# Altium PCB SB13ECU_EVL_V01_14031129.PcbDoc (part 2 of 2)
Units mil, origin at the board's own origin, x right, y up, seen from the top; angles counter-clockwise.
Board outline 4750 x 3350 mil, 2 copper layers (Top Layer, Bottom Layer); 220 components, 147 nets, 766 pads, 407 vias.
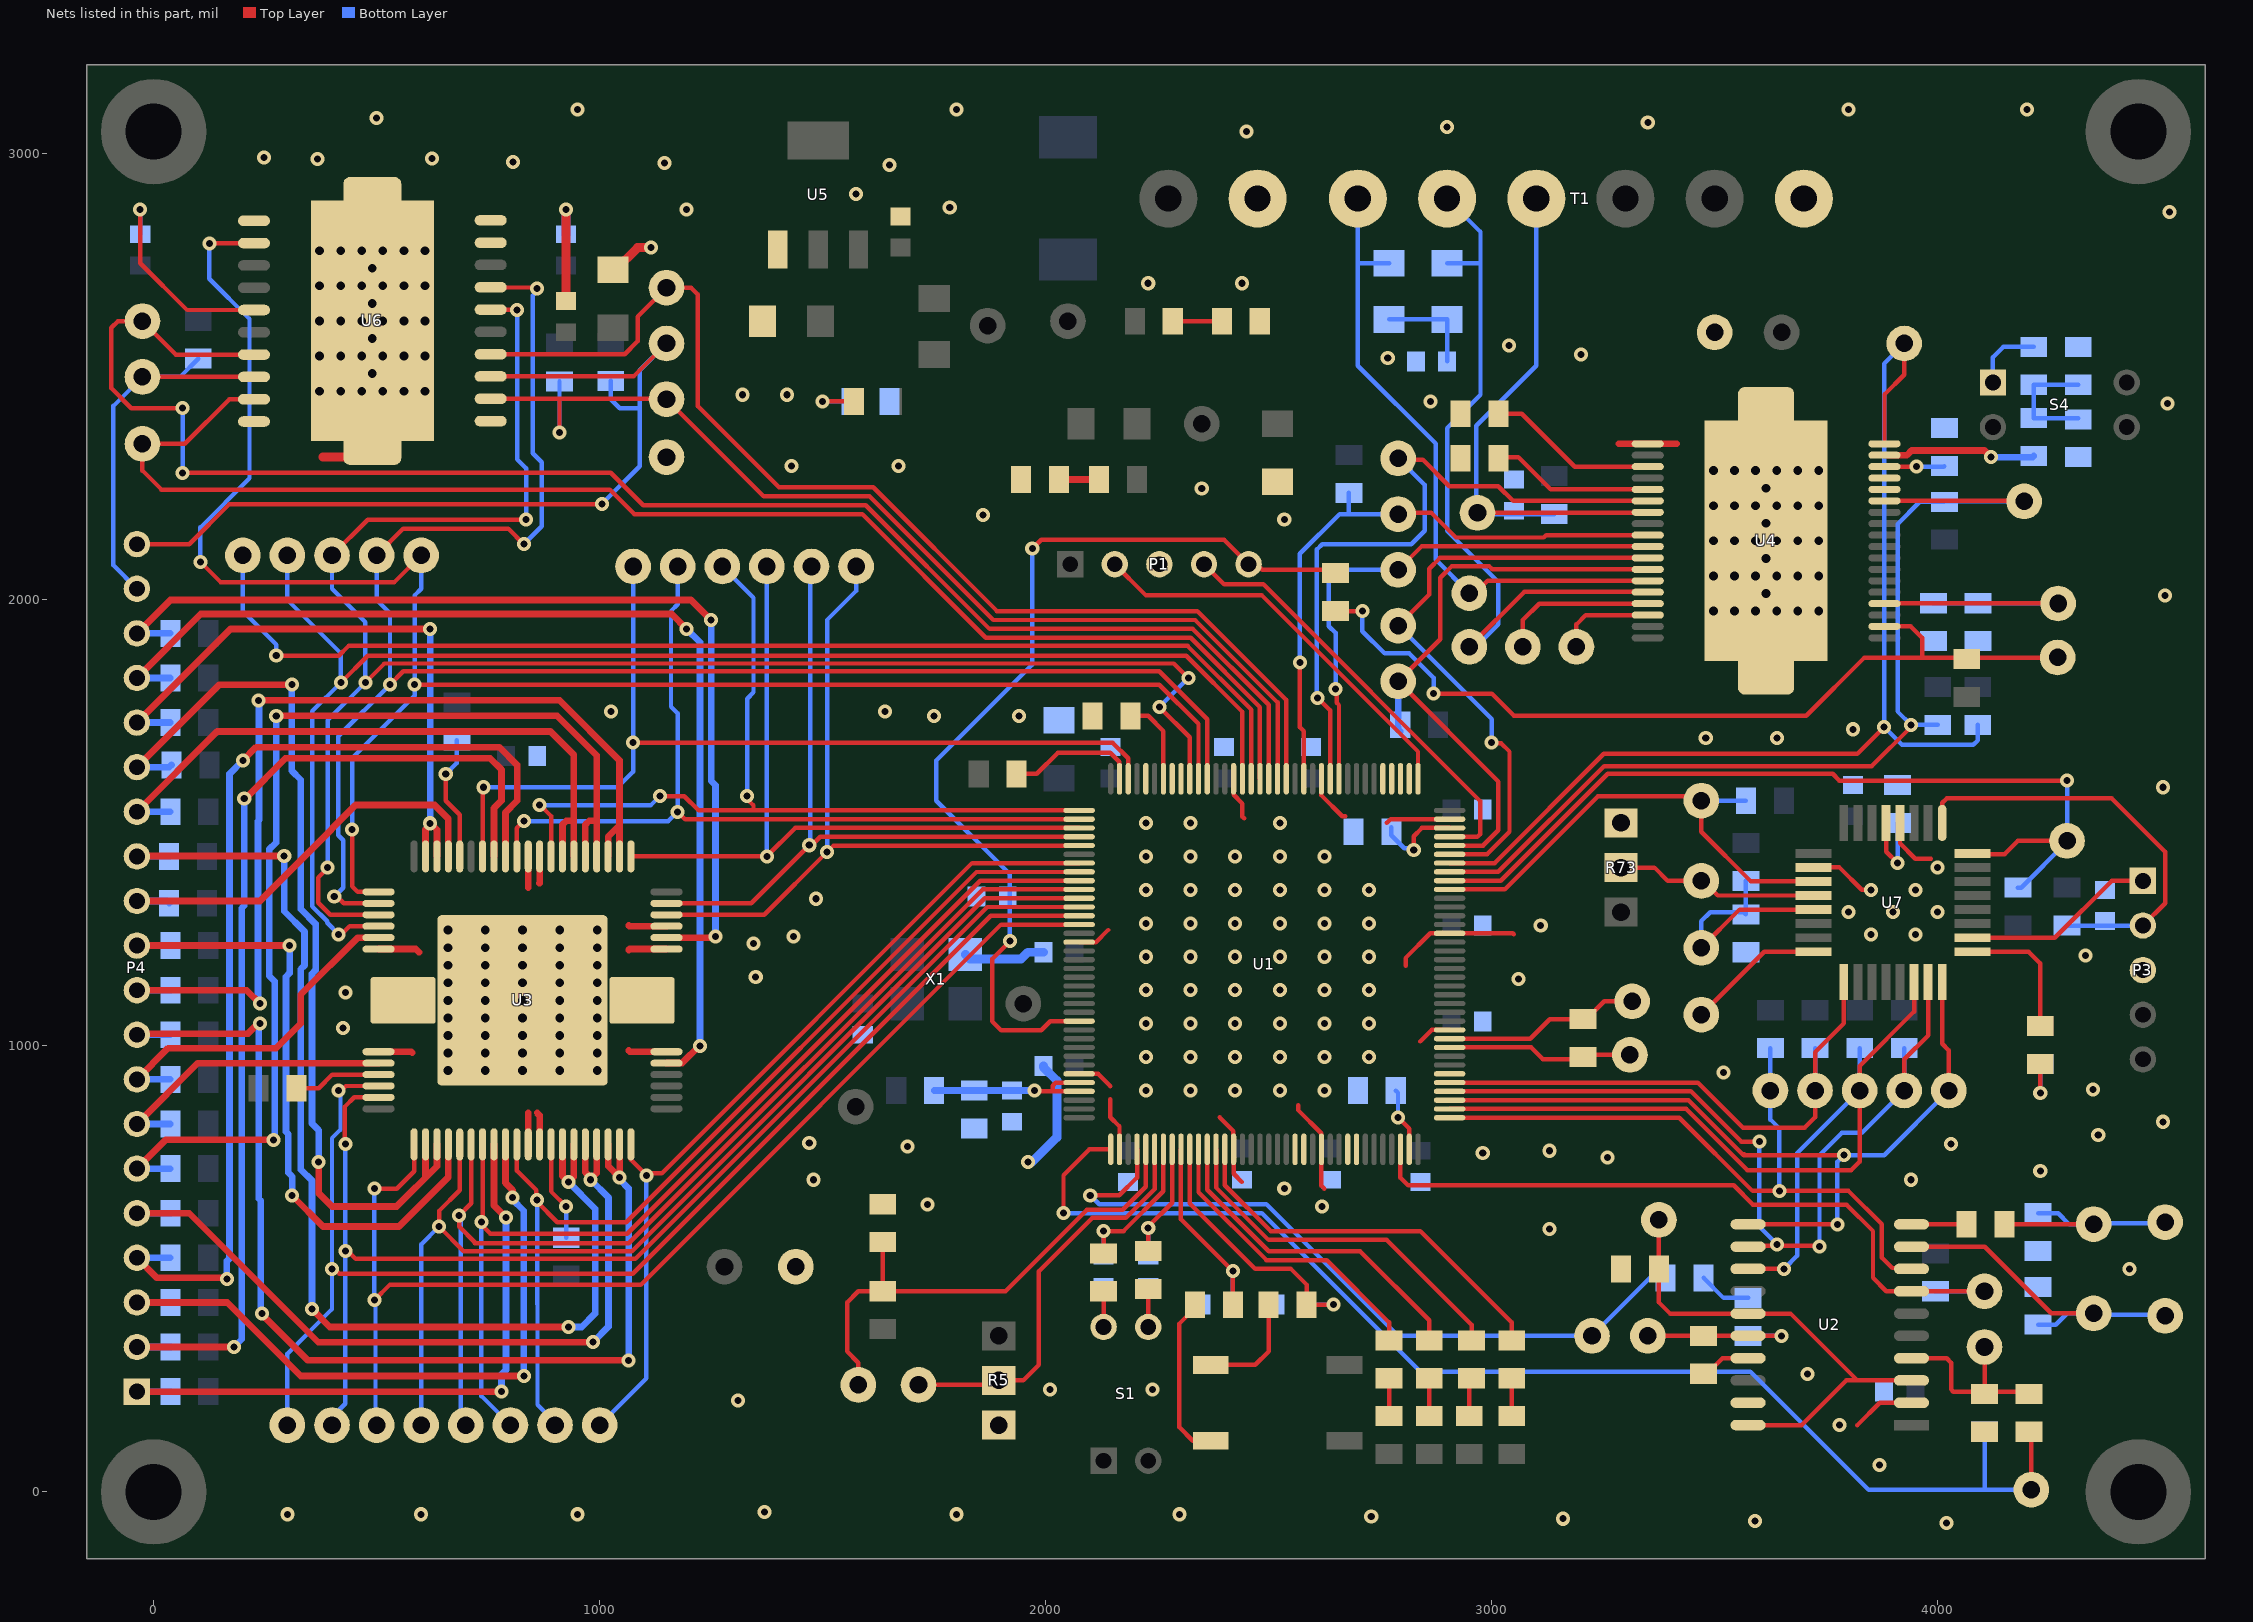
[diagram p2: the nets of this part, all layers, seen from the top]

## Via types
v1: diameter 31.5, hole 15.75, Top Layer to Bottom Layer, 294 vias
v2: diameter 25.59, hole 19.68, Top Layer to Bottom Layer, tented both sides, 113 vias

## Nets (pads, with @x,y where several pads share a name; then routed paths per layer and width w, separated by ;. In a path a pad name is that pad's centre, name@x,y a point inside that pad or via, vN(x,y) a via of type N, cw(c..) or ccw(c..) an arc to the next point about the centre after c; other vN are vias at no path point) (continued)
DGND: C1.2 C2.2 C3.2 C4.2 C5.2 C6.2 C7.1 C8.1 C9.1 C10.1 C11.1 C12.2 C13.2 C14.2 C15.2 C16.2 C17.2 C18.2 C19.2 C20.2 C21.2 C22.2 C23.2 C24.2 C26.1 C27.1 C28.2 C29.2 C30.2 C31.1 C32.2 C33.2 C34.2 C35.1 C36.1 C37.2 C39.1 C40.2 C41.2 C42.2 C43.2 C44.2 P1.3 P3.3 R1.1 R5.1 R8.1 R18.1 R52.2 R53.1 R54.2 R59.2 R61.1 R63.1 R65.1 R72.1 R73.3 R77.1 T1.1 T2.2 TP67.1 TP69.1 TP70.1 U1.16 U1.31 U1.38 U1.51 U1.61 U1.83 U1.94 U1.107 U1.120 U1.130 U2.2 U2.19 U3.11 U3.12 U3.26 U3.27 U3.29 U3.41 U3.42 U3.58 U3.59 U3.65 U4.1 U4.37 U5.1 U6.1 U6.10 U6.11 U6.19 U6.20 U6.21 U7.4 U7.10 X1.2 | length 3559.1
  Top Layer w10: U1.16@2075,1232.8 2112.8,1232.8 2140,1260 ; U1.31@2075.35,937.17 2117.83,937.17 2145,910 ; 2145,880 2145,840 2165.55,819.45 U1.38@2165.55,768.23 ; 2390,840 2421.11,808.89 U1.51@2421.11,768.57 ; U1.51@2421.46,768.23 2421.46,713.54 2440,695 ; U1.130@2421.46,1598.94 2421.46,1562.97 2441.14,1543.28 2441.14,1513.86 2445,1510 ; 2566,867 2566,856.41 2617.96,804.45 ; 2618.31,804.45 U1.61@2618.31,768.23 2618.31,686.69 2625,680 ; U1.120@2618.31,1598.94 2618.31,1561.69 2665,1515 2672,1515 ; 2765,1500 2773.39,1508.39 U1.107@2905.71,1508.39 ; 2807,1180 2807,1197 2862.48,1252.48 U1.94@2905.71,1252.48 3047.52,1252.48 3050,1250 ; 2840,1010 2865.94,1035.94 U1.83@2905.71,1035.94 ; U7.10@3721.3,1400.28 3779.72,1400.28 3830,1350 v1(3850,1350) ; 3820,150 3870,200 U2.2@3941.14,200 ; U7.4@3915.51,1500 3915.51,1454.49 3950,1420 3985,1420
  Top Layer w15: U3.59@504.33,987.01 577.99,987.01 580,985 ; U3.58@504.33,1217.32 587.68,1217.32 595,1210 ; U3.11@839.96,779.33 839.96,849.96 840,850 ; U3.42@839.96,1425 839.96,1355.04 840,1355 ; 860,850 865.55,844.45 U3.12@865.55,779.33 ; 865,1365 865.55,1365.55 U3.41@865.55,1425 ; 1065,990 1067.99,987.01 U3.26@1150,987.01 ; 1065,1215 1067.32,1217.32 U3.27@1150,1217.32 ; 1065,1270 1066.5,1268.5 U3.29@1150,1268.5 ; 3285,2350 U4.1@3350,2350 3415,2350
  Top Layer w20: 380,2320 448.63,2320 U6.21@490.35,2361.72 ; C40.2@925,2670 v1(925,2875) ; C39.1@1030,2740 1035,2740 1085,2790 v1(1115,2790)
  Bottom Layer w20: C41.2@925,2820 v1(925,2875) ; X1.2@1820,1205 1830,1195 1945,1195 1960,1210 C22.2@1995,1210 ; v1(1960,740) 1970,740 2025,795 2025,922.5 1995,952.5 C20.2@1995,955
  other v1: 4020,-70 3590,-65 3160,-60 2730,-55 300,-50 600,-50 950,-50 1800,-50 2300,-50 1370,-45 3870,60 3780,150 1310,205 2010,230 2240,230 3708,264 4430,500 3130,590 2620,640 1735,645 2535,680 1480,700 3940,700 4230,720 3260,750 2980,760 3130,765 1690,775 4030,780 1470,782 4360,800 4505,830 2225,900 2325,900 2425,900 2525,900 2625,900 4348,902 3520,940 2225,975 2325,975 2425,975 2525,975 2625,975 2725,975 425,1040 2225,1050 2325,1050 2425,1050 2525,1050 2625,1050 2725,1050 430,1120 2225,1125 2325,1125 2425,1125 2525,1125 2625,1125 2725,1125 3060,1150 1350,1155 2225,1200 2325,1200 2425,1200 2525,1200 2625,1200 2725,1200 4331,1203 1345,1230 1435,1245 3850,1250 3950,1250 3110,1270 2225,1275 2325,1275 2425,1275 2525,1275 2625,1275 2725,1275 3800,1300 3900,1300 4000,1300 1485,1330 2225,1350 2325,1350 2425,1350 2525,1350 2625,1350 2725,1350 3950,1350 4000,1400 2225,1425 2325,1425 2425,1425 2525,1425 2625,1425 2225,1500 2325,1500 2525,1500 4505,1580 3480,1690 3640,1690 3810,1710 1750,1740 1940,1740 1025,1750 1640,1750 4510,2010 2535,2180 1860,2190 2350,2250 1430,2300 1670,2300 4515,2440 2863,2445 1320,2460 1420,2460 2767,2542 3200,2550 3039,2570 2230,2710 2440,2710 4520,2870 1195,2875 1785,2880 1575,2910 1650,2975 1145,2980 806,2982 367,2989 624,2990 248,2992 2450,3050 2900,3060 3350,3070 500,3081 950,3100 1800,3100 3800,3100 4200,3100
  other v2: 659.84,944.69 743.5,944.69 827.17,944.69 910.83,944.69 994.49,944.69 659.84,984.06 743.5,984.06 827.17,984.06 910.83,984.06 994.49,984.06 659.84,1023.43 743.5,1023.43 827.17,1023.43 910.83,1023.43 994.49,1023.43 659.84,1062.8 743.5,1062.8 827.17,1062.8 910.83,1062.8 994.49,1062.8 659.84,1102.17 743.5,1102.17 827.17,1102.17 910.83,1102.17 994.49,1102.17 659.84,1141.54 743.5,1141.54 827.17,1141.54 910.83,1141.54 994.49,1141.54 659.84,1180.91 743.5,1180.91 827.17,1180.91 910.83,1180.91 994.49,1180.91 659.84,1220.28 743.5,1220.28 827.17,1220.28 910.83,1220.28 994.49,1220.28 659.84,1259.65 743.5,1259.65 827.17,1259.65 910.83,1259.65 994.49,1259.65 3497.24,1975 3544.48,1975 3591.73,1975 3638.97,1975 3686.22,1975 3733.46,1975 3615.35,2014.37 3497.24,2053.74 3544.48,2053.74 3591.73,2053.74 3638.97,2053.74 3686.22,2053.74 3733.46,2053.74 3615.35,2093.11 3497.24,2132.48 3544.48,2132.48 3591.73,2132.48 3638.97,2132.48 3686.22,2132.48 3733.46,2132.48 3615.35,2171.85 3497.24,2211.22 3544.48,2211.22 3591.73,2211.22 3638.97,2211.22 3686.22,2211.22 3733.46,2211.22 3615.35,2250.59 3497.24,2289.96 3544.48,2289.96 3591.73,2289.96 3638.97,2289.96 3686.22,2289.96 3733.46,2289.96 372.24,2468.02 419.49,2468.02 466.73,2468.02 513.98,2468.02 561.22,2468.02 608.46,2468.02 490.35,2507.39 372.24,2546.76 419.49,2546.76 466.73,2546.76 513.98,2546.76 561.22,2546.76 608.46,2546.76 490.35,2586.13 372.24,2625.5 419.49,2625.5 466.73,2625.5 513.98,2625.5 561.22,2625.5 608.46,2625.5 490.35,2664.87 372.24,2704.24 419.49,2704.24 466.73,2704.24 513.98,2704.24 561.22,2704.24 608.46,2704.24 490.35,2743.61 372.24,2782.98 419.49,2782.98 466.73,2782.98 513.98,2782.98 561.22,2782.98 608.46,2782.98
DIO1: TP27.1 U1.9 U3.7 | length 2339.4
  Top Layer w10: U3.7@737.6,779.33 737.6,607.6 v1(735,605) 735,599.18 755.18,579 1062,579 1853.59,1370.59 U1.9@2075,1370.59
  Bottom Layer w10: v1(735,605) 735,215 TP27.1@800,150
DIO2: TP28.1 U1.142 U3.46 | length 2136.2
  Top Layer w10: U3.46@737.6,1425 737.6,1577.6 v1(740,1580) ; v1(1075,1680) 2150,1680 2185.24,1644.76 U1.142@2185.24,1598.94
  Bottom Layer w10: v1(740,1580) 1040,1580 1075,1615 v1(1075,1680) TP28.1@1075,2075
DIO3: TP29.1 U1.8 U3.10 | length 2228.6
  Top Layer w10: U3.10@814.37,779.33 814.37,720.63 858.26,676.74 858.26,651.74 905,605 1060,605 1845,1390 U1.8@2075,1390
  Bottom Layer w10: v1(860,655) 860,420.54 860.75,419.79 860.75,195.26 900,156.01 TP29.1@900,150
DIO4: TP30.1 U1.2 U3.43 | length 1908.6
  Top Layer w10: U3.43@814.37,1425 814.37,1488.55 v1(830,1504.18) ; v1(1175,1525) 1191.61,1508.39 U1.2@2075,1508.39
  Bottom Layer w10: v1(830,1504.18) 1154.18,1504.18 v1(1175,1525) 1175,1745.41 1160,1760.41 1160,1975 1175,1990 TP30.1@1175,2075
DIO5: TP31.1 U1.10 U3.6 | length 2404.9
  Top Layer w10: U3.6@712.01,779.33 712.01,647.01 v1(685,620) 685,595 720,560 ; 720,557.5 1065.25,557.5 1858.65,1350.91 U1.10@2075,1350.91
  Bottom Layer w10: v1(685,620) 689.11,615.89 689.11,160.89 TP31.1@700,150
DIO6: TP32.1 U1.12 U3.63 | length 2789.8
  Top Layer w10: v1(430,540) 435.82,540 453.32,522.5 1079.75,522.5 1868.78,1311.54 U1.12@2075,1311.54 ; v1(430,780) 429.06,780.94 429.06,864.06 449.65,884.65 U3.63@504.33,884.65
  Bottom Layer w10: TP32.1@400,150 400,167.78 430,197.78 v1(430,780)
DIO7: U1.59
DIO8: U1.58
DIO9: TP35.1 U1.7 U3.20 | length 1947.1
  Top Layer w10: U3.20@1070.28,779.33 1070.28,744.72 v1(1105,710) 1109.11,714.11 1139.11,714.11 1834.96,1409.96 U1.7@2075,1409.96
  Bottom Layer w10: TP35.1@1000,150 1105,255 v1(1105,710)
DIO10: TP36.1 U1.3 U3.33 | length 1681.1
  Top Layer w10: U3.33@1070.28,1425 v1(1375,1425) 1438.7,1488.7 U1.3@2075,1488.7
  Bottom Layer w10: v1(1375,1425) TP36.1@1375,2075
DIO11: TP37.1 U1.11 U3.5 | length 2450.6
  Top Layer w10: U3.5@686.42,779.33 686.42,676.42 640,630 v1(640,595) 695,540 1072.5,540 1863.72,1331.22 U1.11@2075,1331.22
  Bottom Layer w10: TP37.1@600,150 600,555 v1(640,595)
DIO12: U1.64
DIO13: U1.65
DIO14: TP40.1 U1.1 U3.40 | length 1946.4
  Top Layer w10: v1(865,1540) 866.73,1540 891.14,1515.59 U3.40@891.14,1425 ; v1(1135,1560) 1190,1560 1221.93,1528.07 1345,1528.07 U1.1@2075,1528.07 ; v1(1330,1560) 1330,1554.18 1345,1539.18 1345,1528.39
  Bottom Layer w10: v1(865,1540) 1115,1540 v1(1135,1560) ; TP40.1@1275,2075 1345,2005 1345,1792.91 1330.75,1778.66 1330.75,1560.75 v1(1330,1560)
DIO15: TP41.1 U1.14 U3.1 | length 2626.3
  Top Layer w10: v1(495,430) 530,465 1073.27,465 ; v1(495,680) 545,680 584.06,719.06 U3.1@584.06,779.33 ; 1073.43,464.84 1092.68,464.84 1900,1272.17 U1.14@2075,1272.17
  Bottom Layer w10: v1(495,680) v1(495,430) 497.5,427.5 497.5,152.5 TP41.1@500,150
DIO16: TP42.1 U1.13 U3.62 | length 2906.6
  Top Layer w10: v1(400,500) 405.61,500 416.61,489 1074,489 1876.85,1291.85 U1.13@2075,1291.85 ; v1(415,900) 420.82,900 431.05,910.24 U3.62@504.33,910.24
  Bottom Layer w10: TP42.1@300,150 300,310 400,410 400,793.48 419,812.48 419,896 v1(415,900)
DIO17: TP25.1 U1.4 U3.31 | length 1613.9
  Top Layer w10: U3.31@1150,1319.69 1339.69,1319.69 v1(1470,1450) 1475.45,1450 1494.47,1469.02 U1.4@2075,1469.02
  Bottom Layer w10: v1(1470,1450) 1472.5,1452.5 1472.5,2072.5 TP25.1@1475,2075
DIO18: TP26.1 U1.5 U3.30 | length 1658.5
  Top Layer w10: U3.30@1150,1294.1 1369.1,1294.1 v1(1510,1435) ; v1@1512.28,1435 v1(1510,1435) ; U1.5@2075,1449.33 1524.33,1449.33 v1(1510,1435)
  Bottom Layer w10: v1(1510,1435) 1510,1955 1575,2020 TP26.1@1575,2075
DIO19: TP79.1 U1.126 U6.7 | length 3632.5
  Top Layer w10: v1(65,2285) 1025,2285 1097.5,2212.5 1596.79,2212.5 1874.29,1935 2330,1935 2500.2,1764.8 U1.126@2500.2,1598.94 ; v1(65,2430) -50,2430 -95,2475 -95,2610 -80,2625 TP79.1@-25,2625 50,2550 U6.7@225,2550
  Bottom Layer w10: v1(65,2285) v1(65,2430)
DIO20: TP80.1 U1.124 U6.14 | length 2583.9
  Top Layer w10: U6.14@755.71,2551 1056,2551 1085,2580 1085,2635 TP80.1@1150,2700 1205,2700 1220,2685 1220,2434.64 1402.14,2252.5 1613.36,2252.5 1890.86,1975 2340,1975 2539.25,1775.75 2539.25,1737.68 2539.57,1737.37 U1.124@2539.57,1598.94
DIO21: TP82.1 U1.127 U6.9 | length 3237.2
  Top Layer w10: U6.9@225,2450 170,2450 70,2350 TP82.1@-25,2350 -25,2290 17.5,2247.5 1022.5,2247.5 1077.5,2192.5 1588.51,2192.5 1866.01,1915 2325,1915 2480.51,1759.49 U1.127@2480.51,1598.94
DIO22: R68.2 TP78.1 U1.125 U6.12 | length 2407.9
  Top Layer w10: U6.12@755.71,2451 1149,2451 1149.5,2450.5 TP78.1@1150,2450 1367.5,2232.5 1605.07,2232.5 1882.57,1955 2335,1955 2519.88,1770.12 U1.125@2519.88,1598.94 ; v1(910,2375) 910,2450.5
  Bottom Layer w10: v1(910,2375) R68.2@910,2490
DIO23: R45.2 TP84.1 U1.100 U7.32 | length 2004.6
  Top Layer w10: U1.100@2905.71,1370.59 3020.59,1370.59 3260,1610 3764.59,1610 3779.59,1595 v1(4290,1595) ; U7.32@4078.23,1431.77 4080,1430 4150,1430 4180,1460 TP84.1@4290,1460
  Bottom Layer w10: R45.2@4180,1355 4187.5,1355 4290,1457.5 v1(4290,1595)
DIO24: R46.2 TP89.1 U1.99 U7.11 | length 1122.4
  Top Layer w10: U1.99@2905.71,1350.91 3029.19,1350.91 3238.28,1560 3460,1560 TP89.1@3470,1550 3470,1480 3581.22,1368.78 U7.11@3721.3,1368.78
  Bottom Layer w10: TP89.1@3470,1550 R46.2@3570,1550
DIO25: R47.2 TP5.1 U1.70 U2.7 | length 1650.2
  Top Layer w10: U1.70@2795.47,768.23 2795.47,704.53 2812.5,687.5 3542.5,687.5 3585.75,644.25 3795.75,644.25 3855,585 3855,480 3885,450 U2.7@3941.14,450 TP5.1@4105,450
  Bottom Layer w10: R47.2@3995,450 TP5.1@4105,450
DIO26: R48.2 R56.1 TP55.1 U1.101 U4.31 | length 2324.5
  Top Layer w10: U1.101@2905.71,1390.28 3015.02,1390.28 3252.25,1627.5 3852.5,1627.5 3940,1715 v1(3940,1720) ; U4.31@3880.71,2222.05 TP55.1@4193.98,2222.05 ; TP55.1@4186.95,2214 TP55.1@4193.98,2221.02
  Bottom Layer w10: R48.2@4000,1720 v1(3940,1720) 3910,1750 3910,2170 3960,2220 R56.1@4015,2220 4016.02,2221.02 TP55.1@4193.98,2221.02
DIO27: R49.2 TP53.1 U1.102 U4.36 | length 2488.1
  Top Layer w10: U1.102@2905.71,1409.96 3006.74,1409.96 ; 3006.74,1410.28 3251.62,1655.16 ; 3251.78,1655 3820,1655 v1(3880,1715) ; U4.36@3880.71,2350 3880.71,2460.71 3925,2505 TP53.1@3925,2575
  Bottom Layer w10: TP53.1@3925,2575 3880,2530 v1(3880,1715) 3920,1675 4080,1675 4090,1685 R49.2@4090,1720
DIO28: TP58.1 U1.118 U4.10 | length 1210.9
  Top Layer w10: v1(2650,1800) 2652.68,1797.32 2652.68,1769.25 2657.68,1764.25 U1.118@2657.68,1598.94 ; TP58.1@2790.35,2067.48 2842.87,2120 U4.10@3349.69,2120
  Bottom Layer w10: v1(2650,1800) 2650,1926.22 2635,1941.22 2635,2061.62 2640.86,2067.48 TP58.1@2790.35,2067.48
DIP0: C5.1 R6.2 U1.43 | length 369.9
  Top Layer w10: R6.2@2130,535 v1(2130,585) 2174.75,585 2263.98,674.23 U1.43@2263.98,768.23
  Bottom Layer w10: C5.1@2130,530 v1(2130,585)
DIP1: C4.1 R7.2 U1.44 | length 312.2
  Top Layer w10: R7.2@2230,540 2230,595 2283.66,648.66 U1.44@2283.66,768.23
  Bottom Layer w10: C4.1@2230,530 v1(2230,591.75)
Fixed_AI: R4.1 R8.2 TP1.1 U1.41 | length 1166.3
  Top Layer w10: TP1.1@1580,240 1580,290 1555,315 1555,425 1580,450 R4.1@1635,450 ; R8.2@1635,560 R4.1@1635,450 ; U1.41@2224.61,768.23 2224.61,684.35 2172.75,632.5 2092.5,632.5 1910,450 R4.1@1635,450
IN_M: U4.32
IN_P: U4.33
LED0: R9.1 U1.47 | length 684.3
  Top Layer w10: U1.47@2342.72,768.23 2342.72,672.28 2495,520 2630,520 2770,380 R9.1@2770,340
LED1: R10.1 U1.48 | length 754.4
  Top Layer w10: U1.48@2362.4,768.23 2362.4,677.6 2500,540 2705,540 2860,385 R10.1@2860,340
LED2: R11.1 U1.49 | length 820.9
  Top Layer w10: U1.49@2382.09,768.23 2382.09,682.66 2499.75,565 2765,565 2955,375 R11.1@2955,340
LED3: R12.1 U1.50 | length 891.2
  Top Layer w10: U1.50@2401.77,768.23 2401.77,687.73 2504.5,585 2840,585 3045,380 R12.1@3045,340
MCU_NRST: C1.1 P1.5 R2.2 U1.25 | length 2175.1
  Top Layer w10: v1(1920,1235) 1880,1195 1880,1055 1900,1035 1990,1035 2010.63,1055.63 U1.25@2075,1055.63 ; v1(1970,2115) 1990,2135 2400,2135 P1.5@2455,2080 ; P1.5@2442.5,2067.5 2445.61,2070.61 2482.27,2070.61 2485.39,2067.5 2642.5,2067.5 R2.2@2650,2060
  Bottom Layer w10: v1(1920,1235) 1920,1385 1755,1550 1755,1640 1970,1855 v1(1970,2115)
MCU_SWCLK: P1.2 U1.109 | length 919.5
  Top Layer w10: P1.2@2151.8,2083.2 2225,2010 2484.95,2010 2834.84,1660.11 U1.109@2834.84,1598.94
MCU_SWDIO: P1.4 U1.105 | length 984
  Top Layer w10: P1.4@2355,2080 2400,2035 2488.23,2035 2974.02,1549.22 2974.02,1474.87 2968.16,1469.02 U1.105@2905.71,1469.02
NetC2_1: C2.1 U1.71 | length 144.3
  Top Layer w10: v1(2790,840) 2815.16,814.84 U1.71@2815.16,768.23
  Bottom Layer w10: C2.1@2785,900 2790,895 v1(2790,840)
NetC3_1: C3.1 U1.106 | length 200.6
  Top Layer w10: v1(2825.29,1439.25) 2825.29,1470.29 2843.7,1488.7 U1.106@2905.71,1488.7
  Bottom Layer w10: C3.1@2775,1490 C3.1@2775,1480 2775,1472.5 2804.14,1443.36 2821.18,1443.36 v1(2825.29,1439.25)
NetC25_1: C25.1 TP4.1 U1.40 | length 1659.1
  Top Layer w10: v1(2100,665) 2165,665 2205,705 U1.40@2205,768.23
  Bottom Layer w10: v1(2100,665) 2120,645 2495,645 2790,350 TP4.1@3225,350 3355,480 C25.1@3390,480
NetC25_2: C25.2 R16.2 | length 118.6
  Bottom Layer w10: C25.2@3475,480 3520,435 R16.2@3575,435
NetC27_2: C27.2 R17.2 TP3.1 U2.4 | length 447.1
  Top Layer w10: U2.4@3941.14,300 4020,300 4030,290 4030,230 4035,225 C27.2@4105,225 ; C27.2@4105,220 C27.2@4105,225 ; TP3.1@4105,335 C27.2@4105,225 ; R17.2@4205,220 4200,225 C27.2@4105,225
NetC28_1: C28.1 TP7.1 U2.9 Y1.2 | length 768.2
  Top Layer w10: U2.9@3941.14,550 4105.31,550 4254.82,400.49 Y1.2@4349.57,400.49
  Bottom Layer w10: C28.1@4225,375 4265,375 4290.49,400.49 Y1.2@4349.57,400.49 4352.31,397.74 4507.26,397.74 TP7.1@4510,395
NetC29_1: C29.1 R19.1 TP8.1 Y1.1 | length 496.8
  Top Layer w10: R19.1@4150,600 4150.49,600.49 Y1.1@4349.57,600.49
  Bottom Layer w10: C29.1@4225,625 4270,625 4294.51,600.49 Y1.1@4349.57,600.49 4351.82,602.74 4507.74,602.74 TP8.1@4510,605
NetC31_2: C31.2 R50.1 R51.1 R77.2 | length 275
  Bottom Layer w10: R77.2@4315.35,2407.48 R50.1@4215.35,2407.48 R51.1@4215.35,2482.48 C31.2@4315.35,2482.48
NetC32_1: C32.1 R55.2 T1.4 TP56.1 U4.7 | length 1324.4
  Top Layer w10: TP56.1@2965.35,2192.48 TP56.1@2968.23,2195.36 2968.78,2195.91 U4.7@3350,2195.91
  Bottom Layer w10: T1.4@3100,2900 3100,2525 2965.35,2390.35 2965.35,2192.48 R55.2@3140.35,2192.48
NetC33_1: C33.1 R57.1 R58.1 | length 224
  Bottom Layer w10: R57.1@2770,2629 R58.1@2900,2629 C33.1@2900,2535
NetC34_1: C34.1 R59.1 TP33.1 U4.22 | length 668.9
  Top Layer w10: U4.22@3880.71,1992.1 TP33.1@4270,1992.1
  Bottom Layer w10: R59.1@3990.35,1992.48 C34.1@4090.35,1992.48 TP33.1@4270,1992.48
NetC38_1: C38.1 U6.5 | length 473.5
  Top Layer w10: v1(-30,2875) -30,2755 75,2650 U6.5@225,2650
  Bottom Layer w10: C38.1@-30,2820 v1(-30,2875)
NetC43_1: C43.1 U7.5 | length 190.8
  Top Layer w10: U7.5@3884.02,1500 3884.51,1499.51 3884.51,1435.49 v1(3910,1410)
  Bottom Layer w10: v1(3910,1410) C43.1@3910,1500
NetD1_2: D1.2 R9.2 | length 85
  Top Layer w10: D1.2@2770,170 R9.2@2770,255
NetD2_2: D2.2 R10.2 | length 85
  Top Layer w10: D2.2@2860,170 R10.2@2860,255
NetD3_2: D3.2 R11.2 | length 87.1
  Top Layer w10: D3.2@2950,170 2950,250 R11.2@2955,255
NetD4_2: D4.2 R12.2 | length 85
  Top Layer w10: D4.2@3045,170 R12.2@3045,255
NetD6_2: D6.2 R61.2 | length 110
  Top Layer w10: D6.2@2285,2625 R61.2@2395,2625
NetD7_2: D7.2 R63.2 | length 90
  Top Layer w15: R63.2@2030,2270 D7.2@2120,2270
NetD8_2: D8.2 R65.2 | length 130
  Top Layer w10: v1@1505,2445 D8.2@1570,2445
  Bottom Layer w10: v1(1500,2445) R65.2@1565,2445
NetD9_1: D9.1 R69.1 | length 130
  Top Layer w10: v1(4230,895) D9.1@4230,960
  Bottom Layer w10: v1(4230,895) R69.1@4230,960
NetD9_2: D9.2 U7.25 | length 302.7
  Top Layer w10: U7.25@4078.23,1211.3 4203.7,1211.3 4230,1185 D9.2@4230,1045
NetP4_19: P4.19 R66.2 TP81.1 U6.8 | length 915.7
  Top Layer w10: TP81.1@-25,2500 U6.8@225,2500
  Bottom Layer w10: P4.19@-37.5,2025 -90,2077.5 -90,2435 TP81.1@-25,2500 59,2500 R66.2@100,2541
NetP4_20: P4.20 R67.2 TP83.1 U6.13 | length 2039.1
  Top Layer w10: P4.20@-37.5,2125 80,2125 170,2215 v1(1005,2215) ; U6.13@755.71,2501 1076,2501 TP83.1@1150,2575
  Bottom Layer w10: v1(1005,2215) 1090,2300 1090,2430 ; R67.2@1025,2491 1025,2450 1045,2430 1090,2430 ; TP83.1@1150,2575 1090,2515 1090,2430
NetR1_2: R1.2 U1.138 | length 195.1
  Top Layer w10: R1.2@2190,1740 2230,1740 2263.98,1706.02 U1.138@2263.98,1598.94
NetR2_1: R2.1 R60.2 TP65.1 U4.20 | length 1956.9
  Top Layer w10: R2.1@2650,1975 v1(2710,1975) ; v1(2870,1790) 3000,1790 3050,1740 3705,1740 3835,1870 3965,1870 ; U4.20@3880.71,1940.55 3939.45,1940.55 3965,1915 3965,1870 ; TP65.1@4269,1870 3965,1870
  Bottom Layer w10: v1(2710,1975) 2710,1930 2760,1880 2815,1880 2870,1825 v1(2870,1790)
NetR3_2: R3.2 U1.143 | length 296.6
  Top Layer w10: R3.2@1935,1610 1980,1610 2027.5,1657.5 2145,1657.5 2165.2,1637.3 U1.143@2165.2,1598.94
NetR6_1: R6.1 S1.4 | length 80
  Top Layer w10: S1.4@2130,370 R6.1@2130,450
NetR7_1: R7.1 S1.3 | length 85
  Top Layer w10: S1.3@2230,370 R7.1@2230,455
NetR13_1: R13.1 S3.1 | length 247.4
  Top Layer w10: S3.1@2370,285 2470,285 2500,315 R13.1@2500,420
NetR14_2: R14.2 S2.1 | length 371.9
  Top Layer w10: R14.2@2335,420 2335,412.5 2300,377.5 2300,145 2330,115 S2.1@2370,115
NetR15_1: R15.1 U2.17 | length 114.5
  Top Layer w10: R15.1@3475,265 3482.5,265 3517.5,300 U2.17@3575,300
NetR15_2: R15.2 R16.1 TP34.1 U2.16 | length 375
  Top Layer w10: TP34.1@3350,350 R15.2@3475,350 U2.16@3575,350 v1(3650,350)
  Bottom Layer w10: R16.1@3575,350 v1(3650,350)
NetR17_1: R17.1 R18.2 TP6.1 U1.37 | length 2908.9
  Top Layer w10: v1(2040,625) 2040,710 2098.23,768.23 U1.37@2145.87,768.23 ; R17.1@4205,130 R17.1@4205,135 4210,130 TP6.1@4210,5
  Bottom Layer w10: v1(2040,625) 2485,625 2840,270 3580,270 3845,5 4105,5 ; R18.2@4105,135 4105,5 ; TP6.1@4210,5 4105,5
NetR19_2: R19.2 U2.10 | length 123.9
  Top Layer w10: U2.10@3941.14,600 R19.2@4065,600
NetR38_1: R38.1 TP48.1 U1.74 U2.13 U7.22 | length 2081.1
  Top Layer w10: U1.74@2905.71,858.78 3436.22,858.78 3573.25,721.75 3805.89,721.75 3825,740.86 TP48.1@3825,900 3825,955 3947.01,1077.01 U7.22@3947.01,1143.07 ; U2.13@3575,500 v1(3655,500)
  Bottom Layer w10: v1@3655.7,500.7 3685,530 3685,760 TP48.1@3825,900 R38.1@3825,995
NetR39_1: R39.1 TP49.1 U1.76 U2.12 U7.23 | length 1968.2
  Top Layer w10: U1.76@2905.71,898.15 3446.85,898.15 3560,785 3599.25,785 v1(3600,785.75) ; U2.12@3575,550 3577.5,552.5 3637.5,552.5 v1(3640,555) 3642.5,552.5 3732.5,552.5 v1(3735,550) ; TP49.1@3925,900 3925,970 3978.5,1023.5 U7.23@3978.5,1143.07
  Bottom Layer w10: v1(3600,785.75) 3600,595 v1(3640,555) ; v1(3735,550) 3735,755 3785,805 3830,805 TP49.1@3925,900 R39.1@3925,995
NetR40_2: R40.2 TP51.1 U1.77 U7.17 | length 1295.8
  Top Layer w10: U1.77@2905.71,917.83 3462.17,917.83 3563.5,816.5 3701.5,816.5 3725,840 TP51.1@3725,900 3725,985.86 3789.53,1050.39 U7.17@3789.53,1143.07
  Bottom Layer w10: TP51.1@3725,900 R40.2@3725,995
NetR41_1: R41.1 TP52.1 U1.73 U2.8 | length 1548.1
  Top Layer w10: U1.73@2905.71,839.09 3420.91,839.09 3585,675 3800,675 3875,600 3875,525 3897.83,502.17 3938.97,502.17 U2.8@3941.14,500
  Bottom Layer w10: R41.1@3625,995 TP52.1@3625,900 3625,835 3645,815 v1(3645,675)
NetR42_1: R42.1 TP57.1 U1.122 U4.9 | length 1398.5
  Top Layer w10: v1(2570,1860) 2570,1715 2578.94,1706.06 U1.122@2578.94,1598.94 ; TP57.1@2790.35,2192.48 2792.87,2195 2865,2195 2920,2140 3116.98,2140 3122.26,2145.28 U4.9@3350,2145.28
  Bottom Layer w10: v1(2570,1860) 2570,2103.28 2659.19,2192.48 2680,2192.48 ; R42.1@2680,2240 2680,2192.48 ; TP57.1@2790.35,2192.48 2680,2192.48
NetR43_1: R43.1 TP60.1 U1.104 U4.12 | length 1414.6
  Top Layer w10: U1.104@2905.71,1449.33 2981.36,1449.33 ; 2981.36,1449.65 3015,1483.28 3015,1592.83 TP60.1@2790.35,1817.48 2885,1912.13 2885,2050 2910,2075 2995,2075 3001.5,2068.5 U4.12@3350,2068.5
  Bottom Layer w15: TP60.1@2790.35,1817.48 2790.35,1709.65 R43.1@2795,1705
NetR44_1: R44.1 TP9.1 U1.82 | length 444
  Top Layer w10: U1.82@2905.71,1016.26 3086.26,1016.26 3130,1060 R44.1@3205,1060 3212.5,1060 3252.5,1100 TP9.1@3315,1100
NetR44_2: R44.2 TP10.1 U1.81 | length 419.4
  Top Layer w10: U1.81@2905.71,996.57 3088.43,996.57 3115,970 3200,970 R44.2@3205,975 3210,980 TP10.1@3310,980
NetR50_2: R50.2 U4.35 | length 346.3
  Top Layer w15: U4.35@3880.71,2324.41 3930.93,2324.41 3941.52,2335 4105,2335 v1(4120,2320)
  Bottom Layer w15: v1(4120,2320) 4212.87,2320 R50.2@4215.35,2322.48
NetR51_2: R51.2 S4.1 | length 157.7
  Bottom Layer w10: S4.1@4123.87,2487.46 4123.87,2543.87 4147.48,2567.48 R51.2@4215.35,2567.48
NetR52_1: R52.1 U4.3 | length 383.8
  Top Layer w10: R52.1@3015.35,2417.48 3067.52,2417.48 3186.18,2298.82 U4.3@3350,2298.82
NetR53_2: R53.2 U4.34 | length 134.7
  Top Layer w10: U4.34@3880.71,2298.91 3951.91,2298.91 v1(3952,2299)
  Bottom Layer w10: v1(3952,2299) 4014,2299 R53.2@4015,2300
NetR54_1: R54.1 U4.5 | length 365.7
  Top Layer w10: R54.1@3015.35,2317.48 3017.87,2320 3060,2320 3132.36,2247.64 U4.5@3350,2247.64
NetR57_2: R57.2 T1.6 TP61.1 U4.13 | length 1470.1
  Top Layer w10: TP61.1@2950,2015 2962.94,2015 2990.86,2042.91 U4.13@3350,2042.91
  Bottom Layer w10: T1.6@2700,2900 2700,2755 ; R57.2@2770,2755 2700,2755 ; TP61.1@2950,2015 2875,2090 2875,2350 2700,2525 2700,2755
NetR58_2: R58.2 T1.5 TP62.1 U4.14 | length 1667.6
  Top Layer w10: TP62.1@2950,1895 3073.42,2018.42 U4.14@3348.9,2018.42
  Bottom Layer w10: R58.2@2900,2755 2975,2755 ; T1.5@2900,2900 2975,2825 2975,2755 ; TP62.1@2960,1890 3015,1945 3015,2040 2900,2155 2900,2385 2975,2460 2975,2755
NetR71_1: R71.1 R72.2 TP88.1 U7.13 | length 532.2
  Top Layer w10: TP88.1@3470,1220 3555.79,1305.79 U7.13@3721.3,1305.79
  Bottom Layer w10: TP88.1@3470,1220 3470,1280 3490,1300 3565,1300 R72.2@3570,1295 R71.1@3570,1370
NetR73_2: R73.2 TP90.1 U7.12 | length 457.3
  Top Layer w10: R73.2@3290,1400 3365,1400 3395,1370 3474.06,1370 3506.78,1337.28 U7.12@3721.3,1337.28
NetR74_1: R74.1 U3.61 | length 197.1
  Top Layer w10: R74.1@320,905 370,905 400.83,935.83 U3.61@504.33,935.83
NetR75_2: R75.2 U3.48 | length 283.4
  Top Layer w10: v1(655,1609.25) 655,1550 686.42,1518.58 U3.48@686.42,1425
  Bottom Layer w10: v1(655,1609.25) 680,1634.25 R75.2@680,1685
NetR76_1: R76.1 U3.13 | length 223.4
  Top Layer w10: U3.13@891.14,779.33 891.14,673.86 v1(925,640)
  Bottom Layer w10: R76.1@925,570 v1(925,640)
NetTP43_1: TP43.1 U1.129 U3.56 | length 3296.4
  Top Layer w10: v1(415,1250) 420.82,1250 439.32,1268.5 U3.56@504.33,1268.5 ; v1(420,1815) 480,1875 2315,1875 2441.14,1748.86 U1.129@2441.14,1598.94
  Bottom Layer w10: TP43.1@300,2100 300,2000 420,1880 v1(420,1815) 355.26,1750.26 355.26,1313.27 388.99,1279.55 388.99,1276.01 v1(415,1250)
NetTP44_1: TP44.1 U1.128 | length 2665.2
  Top Layer w10: v1(275,1875) 415.41,1875 437.16,1896.75 2318.25,1896.75 2460.83,1754.17 U1.128@2460.83,1598.94
  Bottom Layer w10: TP44.1@200,2100 200,1975 275,1900 v1(275,1875)
NetTP45_1: TP45.1 U1.133 U3.54 U6.17 | length 4043.9
  Top Layer w10: v1(405,1335) 410.82,1335 426.13,1319.69 U3.54@504.33,1319.69 ; TP45.1@500,2100 560,2160 795,2160 v1(830,2125) ; v1(530,1810) 560,1840 2255,1840 2362.4,1732.6 U1.133@2362.4,1598.94 ; U6.17@755.71,2701 756.21,2700.5 857.89,2700.5 v1(860,2698.39)
  Bottom Layer w10: v1(405,1335) 425,1355 425,1461.52 414.25,1472.26 414.25,1694.25 v1(530,1810) 530,1970 500,2000 TP45.1@500,2100 ; v1(830,2125) 870,2165 870,2308.88 850,2328.88 850,2682.58 860,2692.58 v1(860,2698.39)
NetTP46_1: TP46.1 U1.135 U3.55 U6.16 | length 4163.8
  Top Layer w10: v1(390,1400) 390,1398.52 369,1377.52 369,1321 395.9,1294.1 U3.55@504.33,1294.1 ; TP46.1@400,2100 480,2180 v1(835,2180) ; v1(475,1815) 517.5,1857.5 2287.5,1857.5 v1(2320,1825) ; U6.16@755.71,2651 756.21,2650.5 814.5,2650.5 v1(815,2650) ; v1(2255,1760) 2323.03,1691.97 U1.135@2323.03,1598.94
  Bottom Layer w10: v1(390,1400) 390,1730 v1(475,1815) 475,1950 400,2025 TP46.1@400,2100 ; v1(815,2650) 815,2315 835,2295 v1(835,2180) ; v1(2255,1760) v1(2320,1825)
NetTP47_1: TP47.1 U1.134 U3.53 U6.2 | length 4224.2
  Top Layer w10: v1(105,2085) 150,2040 540,2040 TP47.1@600,2100 ; v1(125,2799.61) 125.2,2799.8 224.8,2799.8 U6.2@225,2800 ; v1(445,1485) 445,1358.12 457.85,1345.28 U3.53@504.33,1345.28 ; v1(585,1810) 2255,1810 2342.72,1722.28 U1.134@2342.72,1598.94
  Bottom Layer w10: v1(105,2085) 105,2162.5 215,2272.5 215,2630 125,2720 v1(125,2799.61) ; v1(445,1485) 445,1645 585,1785 v1(585,1810) 585,2010 600,2025 TP47.1@600,2100
NetTP50_1: TP50.1 U1.75 U2.11 U7.24 | length 1845.8
  Top Layer w10: U1.75@2905.71,878.46 3441.28,878.46 3564.75,755 ; 3566.52,756.77 3568.28,755 v1(3790,755) ; U2.11@3575,600 v1(3775,600) ; U7.24@4010,1143.07 4010,1005 4025,990 TP50.1@4025,900
  Bottom Layer w10: v1(3775,600) 3775,740 v1(3790,755) ; v1@3790,749.18 v1(3790,755) ; TP50.1@4025,900 3880,755 v1(3790,755)
NetTP54_1: TP54.1 U1.119 U4.6 | length 1571.9
  Top Layer w10: v1(2610,1780) 2637.68,1752.32 2637.68,1752.01 ; U1.119@2637.99,1598.94 2637.99,1752.01 ; TP54.1@2790.35,2317.48 2793.18,2314.65 2845.35,2314.65 2905,2255 3015,2255 3047.95,2222.05 U4.6@3350,2222.05
  Bottom Layer w10: v1(2610,1780) 2608.25,1781.75 2608.25,2113.25 2620,2125 2820,2125 2850,2155 2850,2257.83 TP54.1@2790.35,2317.48
NetTP59_1: TP59.1 U1.103 U4.11 | length 1389.1
  Top Layer w10: TP59.1@2790.35,1942.48 2860,2012.13 2860,2070 2884.09,2094.09 U4.11@3350,2094.09 ; U1.103@2905.71,1429.65 2989.65,1429.65 3040,1480 3040,1660 3021.74,1678.26 3001.74,1678.26 v1(3000,1680)
  Bottom Layer w10: TP59.1@2790.35,1942.48 3000,1732.83 v1(3000,1680)
NetTP85_1: TP85.1 U7.16 | length 309.8
  Top Layer w10: TP85.1@3470,1070 3611.3,1211.3 U7.16@3721.3,1211.3
NetU1_78: U1.78
NetU1_110: U1.110
NetU1_111: U1.111
NetU1_112: U1.112
NetU1_113: U1.113
NetU1_136: U1.136
NetU1_137: U1.137
NetU1_140: U1.140
NRST: C42.1 P3.2 R70.2 U7.1 | length 954.6
  Top Layer w10: U7.1@4010,1500 4010.4,1500.4 4010.4,1545.4 4020,1555 4390,1555 4510,1435 4510,1320 P3.2@4460,1270
  Bottom Layer w10: R70.2@4290,1270 4375,1270 P3.2@4460,1270
OUt1: P4.1 R20.2 U3.8 | length 1462.1
  Top Layer w15: P4.1@-37.5,225 v1(780,225) ; U3.8@763.19,779.33 763.19,642.28 790,615.47 v1(790,615)
  Bottom Layer w15: P4.1@-37.5,225 R20.2@37.5,225 ; v1(780,225) 780,263.25 790,273.25 v1(790,615)
OUt2: P4.2 R21.2 U3.45 | length 2358.1
  Top Layer w15: P4.2@-37.5,325 v1(180,325) ; v1(203.25,1555) 205.75,1555 295.75,1645 754.4,1645 780,1619.4 780,1550 763.19,1533.19 U3.45@763.19,1425
  Bottom Layer w15: P4.2@-37.5,325 R21.2@37.5,325 ; v1(180,325) 197.5,342.5 197.5,1308.9 203.25,1314.65 v1(203.25,1555)
OUt3: P4.3 R22.2 U3.9 | length 1547.3
  Top Layer w15: P4.3@-37.5,425 165,425 330,260 v1(830,260) ; U3.9@788.78,779.33 788.78,692.94 805,676.72 v1(805,660)
  Bottom Layer w15: P4.3@-37.5,425 R22.2@37.5,425 ; v1(805,660) 805,655.54 830,630.54 v1(830,260)
OUt4: P4.4 R23.2 U3.44 | length 2333
  Top Layer w15: P4.4@-37.5,525 7.5,480 162.15,480 v1(164.25,477.9) ; v1(200,1640) 230,1670 775,1670 815,1630 815,1549.64 788.78,1523.42 U3.44@788.78,1425
  Bottom Layer w15: P4.4@-37.5,525 R23.2@37.5,525 ; v1(164.25,477.9) 164.25,517.9 170,523.65 170,1610 v1(200,1640)
OUt5: P4.5 R24.2 U3.16 U3.17 | length 1780.2
  Top Layer w15: P4.5@-37.5,625 80,625 369.25,335.75 v1(985,335.75) ; U3.16@967.91,779.33 967.91,716.55 980,704.46 v1@980,701.67 ; v1(980,700) v1@980,701.67 ; U3.17@993.5,779.33 993.5,715.18 v1@980,701.67
  Bottom Layer w15: P4.5@-37.5,625 R24.2@37.5,625 ; v1(980,700) 1020,660 1020,370.75 v1(985,335.75)
OUt6: P4.6 R25.2 U3.36 U3.37 | length 2454.5
  Top Layer w15: P4.6@-37.5,725 27.5,790 268.29,790 v1(268.97,789.32) ; v1(275,1740) 905,1740 993.5,1651.5 993.5,1505 ; U3.37@967.91,1425 967.91,1496.21 976.7,1505 993.5,1505 ; U3.36@993.5,1425 993.5,1505
  Bottom Layer w15: P4.6@-37.5,725 R25.2@37.5,725 ; v1(268.97,789.32) 271.75,792.1 271.75,1144.71 259,1157.47 259,1440.27 275,1456.27 v1(275,1740)
OUt7: P4.7 R26.2 U3.60 | length 673.3
  Top Layer w15: P4.7@-37.5,825 98.92,961.42 U3.60@504.33,961.42
  Bottom Layer w15: P4.7@-37.5,825 R26.2@37.5,825
OUt8: P4.8 R27.2 U3.57 | length 786.6
  Top Layer w15: P4.8@-37.5,925 32.5,995 275,995 330,1050 330,1115 457.91,1242.91 U3.57@504.33,1242.91
  Bottom Layer w15: P4.8@-37.5,925 R27.2@37.5,925
OUt9: P4.9 R28.2 U3.18 U3.19 | length 2459.8
  Top Layer w15: P4.9@-37.5,1025 -35,1027.5 211.54,1027.5 234.04,1050 v1(238.5,1050) ; v1(243.25,400) 243.25,397.5 345.75,295 v1(1065,295) ; U3.18@1019.24,779.33 1019.24,730.76 v1@1044.83,705.17 ; U3.19@1044.83,779.33 v1@1044.83,705.17 ; v1(1045,705) v1@1044.83,705.17
  Bottom Layer w15: P4.9@-37.5,1025 R28.2@37.5,1025 ; v1(238.5,1050) 235.72,1047.22 235.72,657.53 240.37,652.88 240.37,402.87 v1(243.25,400) ; v1(1045,705) 1045,700.54 1065,680.54 v1(1065,295)
OUt10: P4.10 R29.2 U3.34 U3.35 | length 2206.6
  Top Layer w15: P4.10@-37.5,1125 208.5,1125 v1(238.5,1095) ; v1(235,1775) 910,1775 1044.68,1640.32 1044.68,1494.68 ; U3.35@1019.09,1425 1019.09,1469.09 1044.68,1494.68 ; U3.34@1044.68,1425 1044.68,1494.68 ; 1045,1495 1044.68,1494.68
  Bottom Layer w15: P4.10@-37.5,1125 R29.2@37.5,1125 ; v1@234,1095 234,1504 236.5,1506.5 236.5,1773.5 v1(235,1775)
OUt11: P4.11 R30.2 U3.4 | length 1485.6
  Top Layer w15: P4.11@-37.5,1225 v1(305,1225) ; v1(310.75,665) 310.75,664.25 380,595 550,595 660.83,705.83 U3.4@660.83,779.33
  Bottom Layer w15: P4.11@-37.5,1225 R30.2@37.5,1225 ; v1(305,1225) 305,1163.32 296.75,1155.07 296.75,807.59 302.22,802.12 302.22,715.61 310.75,707.08 v1(310.75,665)
OUt12: P4.12 R31.2 U3.49 | length 959.2
  Top Layer w15: P4.12@-37.5,1325 238.54,1325 345.76,1432.22 345.76,1432.78 452.98,1540 630,1540 660.83,1509.17 U3.49@660.83,1425
  Bottom Layer w15: P4.12@-37.5,1325 30,1325 R31.2@35,1320
OUt13: P4.13 R32.2 U3.14 U3.15 | length 2620
  Top Layer w15: P4.13@-37.5,1425 -36.82,1425.68 292.2,1425.68 v1(292.88,1426.37) ; v1(355,410) 395,370 v1(930,370) ; U3.14@916.73,779.33 916.73,708.27 v1(930,695) ; v1@930,699.46 v1(930,695) ; U3.15@942.32,779.33 942.32,707.32 v1(930,695)
  Bottom Layer w15: P4.13@-37.5,1425 R32.2@35,1425 ; v1(292.88,1426.37) 292.88,1302.12 338.25,1256.75 338.25,1180.42 330,1172.18 330,723.18 355,698.18 v1(355,410) ; v1(930,370) 960,370 990,400 990,635 v1(930,695)
OUt14: P4.14 R33.2 U3.38 U3.39 | length 1479.2
  Top Layer w15: P4.14@-37.5,1525 142.5,1705 890,1705 942.32,1652.68 942.32,1505 ; U3.39@916.73,1425 916.73,1496.21 925.52,1505 942.32,1505 ; U3.38@942.32,1425 942.32,1505
  Bottom Layer w15: P4.14@-37.5,1525 R33.2@37.5,1525
OUt15: P4.15 R34.2 U3.2 U3.3 | length 2113.9
  Top Layer w15: P4.15@-37.5,1625 147.5,1810 v1(310,1810) ; v1(370,740) 370,670 400,640 545,640 635.24,730.24 U3.3@635.24,779.33 ; 609.5,705 U3.2@609.5,779.33
  Bottom Layer w15: P4.15@-37.5,1625 35,1625 R34.2@40,1630 ; v1(310,1810) 310,1616.77 330,1596.77 330,1306.72 363.25,1273.47 363.25,1170.07 355,1161.82 355,826.23 370,811.23 v1(370,740)
OUt16: P4.16 R35.2 U3.50 U3.51 | length 1415.8
  Top Layer w15: P4.16@-37.5,1725 172.5,1935 v1(620,1935) ; U3.51@609.65,1425 609.65,1485.18 620,1495.54 620,1500 635.24,1484.76 U3.50@635.24,1425
  Bottom Layer w15: P4.16@-37.5,1725 R35.2@37.5,1725 ; v1(620,1499.25) v1(620,1935)
OUt17: P4.17 R36.2 U3.25 | length 2419.6
  Top Layer w15: P4.17@-37.5,1825 105.75,1968.25 1161.75,1968.25 v1(1195,1935) ; U3.25@1150,961.42 1150.14,961.56 1185.05,961.56 v1@1225,1001.51
  Bottom Layer w15: P4.17@-37.5,1825 R36.2@37.5,1825 ; v1(1195,1935) 1225,1905 v1(1225,1000)
OUt18: P4.18 R37.2 U3.28 | length 2237.2
  Top Layer w15: P4.18@-37.5,1925 37.5,2000 1205,2000 v1(1250,1955) ; U3.28@1150,1242.91 1257.91,1242.91 v1(1260,1245)
  Bottom Layer w15: P4.18@-37.5,1925 R37.2@37.5,1925 ; v1(1250,1955) 1250,1594.63 1260,1584.63 v1(1260,1245)
PUSH0: C9.2 R13.2 U1.46 | length 623.6
  Top Layer w10: U1.46@2323.03,768.23 2323.03,646.97 2470,500 2550,500 2585,465 R13.2@2585,420 v1(2645,420)
  Bottom Layer w10: C9.2@2585,420 v1(2645,420)
PUSH1: C10.2 R14.1 U1.45 | length 471.5
  Top Layer w10: U1.45@2303.35,768.23 2303.35,611.65 v1(2420,495) R14.1@2420,420
  Bottom Layer w10: C10.2@2420,420 v1(2420,495)
SA: C26.2 TP38.1 U2.3 U2.15 U2.20 | length 1110.1
  Top Layer w10: TP38.1@3375,610 C26.2@3375,500 3375,425 3400,400 U2.15@3575,400 3670,400 3820,250 ; U2.20@3575,150 3695,150 3795,250 3820,250 ; U2.3@3941.14,250 3820,250
SWM: P3.1 U7.26 | length 434.5
  Top Layer w10: U7.26@4078.23,1242.79 4262.79,1242.79 4390,1370 P3.1@4460,1370
Variable_AI: R5.2 TP11.1 U1.42 | length 923.2
  Top Layer w10: TP11.1@1715,240 1885,240 R5.2@1895,250 1950,250 1985,285 1985,495 2105,615 2180,615 2244.29,679.29 U1.42@2244.29,768.23
VDDA: C7.2 C8.2 L1.2 U1.32 U1.33 | length 400.5
  Top Layer w10: v1(1975,900) 1976.85,898.15 2015.88,898.15 ; U1.33@2075,898.15 2015.88,898.15 ; U1.32@2075,917.83 2022.83,917.83 2015.88,910.88 2015.88,898.15
  Bottom Layer w15: L1.2@1750,900 C7.2@1840,900 C8.2@1925,900 v1(1975,900)
VTRK1: TP63.1 U4.15 | length 355.2
  Top Layer w10: TP63.1@3070,1895 3070,1955 3106.73,1991.73 U4.15@3350,1991.73
VTRK2: TP64.1 U4.16 | length 218.8
  Top Layer w10: TP64.1@3190,1895 3190,1945 3211.14,1966.14 U4.16@3350,1966.14
pads on no net: P3.5 S4.2 S4.3 U1.15 U1.18 U1.19 U1.20 U1.21 U1.22 U1.24 U1.26 U1.27 U1.28 U1.29 U1.34 U1.35 U1.36 U1.53 U1.54 U1.55 U1.56 U1.57 U1.60 U1.63 U1.66 U1.67 U1.68 U1.69 U1.79 U1.80 U1.85 U1.86 U1.87 U1.88 U1.89 U1.90 U1.91 U1.92 U1.93 U1.96 U1.97 U1.98 U1.114 U1.115 U1.116 U1.117 U1.123 U1.132 U1.139 U1.141 U2.5 U2.6 U2.14 U2.18 U3.21 U3.22 U3.24 U3.32 U3.52 U3.64 U4.2 U4.4 U4.8 U4.19 U4.21 U4.23 U4.24 U4.25 U4.26 U4.27 U4.28 U4.29 U4.30 U6.4 U7.2 U7.3 U7.8 U7.14 U7.15 U7.18 U7.19 U7.20 U7.21 U7.27 U7.28 U7.29 U7.30 U7.31

## Polygon pours and split planes (outlines as drawn)
DGND on Top Layer "Top Layer-DGND" (solid, remove dead copper, pour order 0): -150,3200 4600,3200 4600,-150 -150,-150
DGND on Bottom Layer "DGND_L02_P001" (solid, remove dead copper, pour order 1): -150,3200 4600,3200 4600,-150 -150,-150

## Keep-outs
Keep-Out Layer:
  the board outline again, w10

## Other copper
Top Layer:
  pour cut-out: 3980,430 3980,320 4100,320 4110,330 4110,430

## Silkscreen, mask and mechanical layers (free items; w line width, h text height)
Top Overlay:
  lines w10: 2700,2140 2717.83,2140 2740.35,2117.48 ; 4155,325 4205,325 4290,240 4290,190 4310,170 4510,170
  text "SB13ECU_EVL_V01_14031129" at 143,3118 h30
  text "12VIN" at 2187,3117 h45
  text "GND" at 2407,3117 h45
  text "CANL" at 2622,3117 h45
  text "CANH" at 2812,3117 h45
  text "KLine" at 3002,3117 h45
  text "12V" at 3422,3117 h45
  text "+5V" at 3237,3112 h45
  text "GND" at 3607,3112 h45
  text "IN2_U6" at 1283,2687 h30 r90
  text "GND" at 3356,2634 h30
  text "+5V" at 3714,2622 h30
  text "IN2_U6" at -97,2582 h30 r90
  text "O2_U6" at 1288,2527 h30 r90
  text "ENABLE" at 3861,2480 h30
  text "O1_U6" at -97,2427 h30 r90
  text "ABE_U6" at 917,2426 h30
  text "3.3V" at 1557,2367 h30
  text "3.3VReg" at 1883,2347 h30 r90
  text "DIS" at -92,2317 h30 r90
  text "5VReg" at 2277,2297 h30
  text "K_TX" at 2617,2292 h30
  text "GND" at 1222,2287 h30
  text "SMOT" at 4267,2197 h30
  text "K_RX" at 2617,2182 h30
  text "K-Line" at 3037,2157 h30
  text "3.3V" at 1982,2147 h30
  text "GND" at 2222,2147 h30
  text "SWD" at 2322,2147 h30
  text "GND" at 2427,2147 h30
  text "SWC" at 2122,2142 h30
  text "O2U6" at 27,2117 h30
  text "KEY" at 2723,2027 h30 r90
  text "O1U6" at 27,2017 h30
  text "CANL" at 3017,2007 h30
  text "IN4" at 1152,1982 h30
  text "MISO" at 562,1972 h30
  text "MOSI" at 357,1967 h30
  text "CS_2" at 147,1962 h30
  text "OSC" at 4338,1962 h30
  text "CS_1" at 313,1937 h30 r90
  text "IN2" at 1027,1932 h30
  text "RST" at 1447,1932 h30
  text "AEB" at 1588,1932 h30 r90
  text "SCLK" at 513,1927 h30 r90
  text "O18" at 27,1912 h30
  text "IN10" at 1393,1912 h30 r90
  text "CANRX" at 2587,1907 h30
  text "IN14" at 1303,1882 h30 r90
  text "RST_OUT" at 4339,1837 h30
  text "O17" at 27,1817 h30
  text "CANH" at 2906,1763 h30
  text "O16" at 27,1717 h30
  text "CANTX" at 2723,1697 h30 r90
  text "VTRK1" at 3118,1662 h30 r90
  text "VTRK2" at 3243,1652 h30 r90
  text "O15" at 27,1617 h30
  text "SPARE" at 3537,1527 h30
  text "O14" at 27,1517 h30
  text "O13" at 27,1417 h30
  text "SWM" at 4287,1357 h30
  text "AIV" at 3537,1347 h30
  text "O12" at 27,1317 h30
  text "NRST" at 4287,1257 h30
  text "O11" at 27,1217 h30
  text "AIF" at 3537,1197 h30
  text "GND" at 4287,1157 h30
  text "O10" at 27,1117 h30
  text "FrO" at 3177,1107 h30
  text "+5V" at 4277,1067 h30
  text "O9" at 27,1017 h30
  text "CLK" at 1907,997 h30
  text "N.C" at 4292,955 h30
  text "O8" at 27,917 h30
  text "3.3VMCU" at 1313,848 h30
  text "FrI" at 3277,847 h30
  text "O7" at 27,817 h30
  text "CS2_1" at 3537,812 h30
  text "MISO" at 3997,807 h30
  text "MOSI" at 3877,767 h30
  text "SCLK" at 3843,727 h30 r90
  text "O6" at 27,717 h30
  text "CS2_2" at 3738,657 h30 r90
  text "O5" at 27,617 h30
  text "Vref" at 3207,597 h30
  text "O4" at 27,517 h30
  text "O3" at 27,417 h30
  text "+5V" at 1232,407 h30
  text "DGND" at 1387,402 h30
  text "INT/HLD" at 4223,397 h30 r90
  text "O2" at 27,317 h30
  text "Knock_IN" at 3177,252 h30
  text "O1" at 27,217 h30
  text "OUT_5V" at 4317,192 h30
  text "AI_F" at 1527,102 h30
  text "AI_V" at 1657,102 h30
  text "IN1" at 777,27 h30
  text "IN6" at 357,17 h30
  text "IN11" at 567,17 h30
  text "IN3" at 913,17 h30 r90
  text "IN9" at 967,17 h30
  text "IN5" at 713,7 h30 r90
  text "IN15" at 511.35,-10.19 h30 r90
  text "IN16" at 303,-13 h30 r90
  text "Knock_OUT" at 4077,-88 h30